# Altium PCB ECG_Ctrl_V1.0_ZM_20211208.PcbDoc (part 1 of 2)
Units mil, origin at the board's own origin, x right, y up, seen from the top; angles counter-clockwise.
Board outline 3748.77 x 3514.71 mil, 2 copper layers (Top Layer, Bottom Layer); 220 components, 162 nets, 692 pads, 666 vias.
Unrouted connection lines stored in the file: 1.
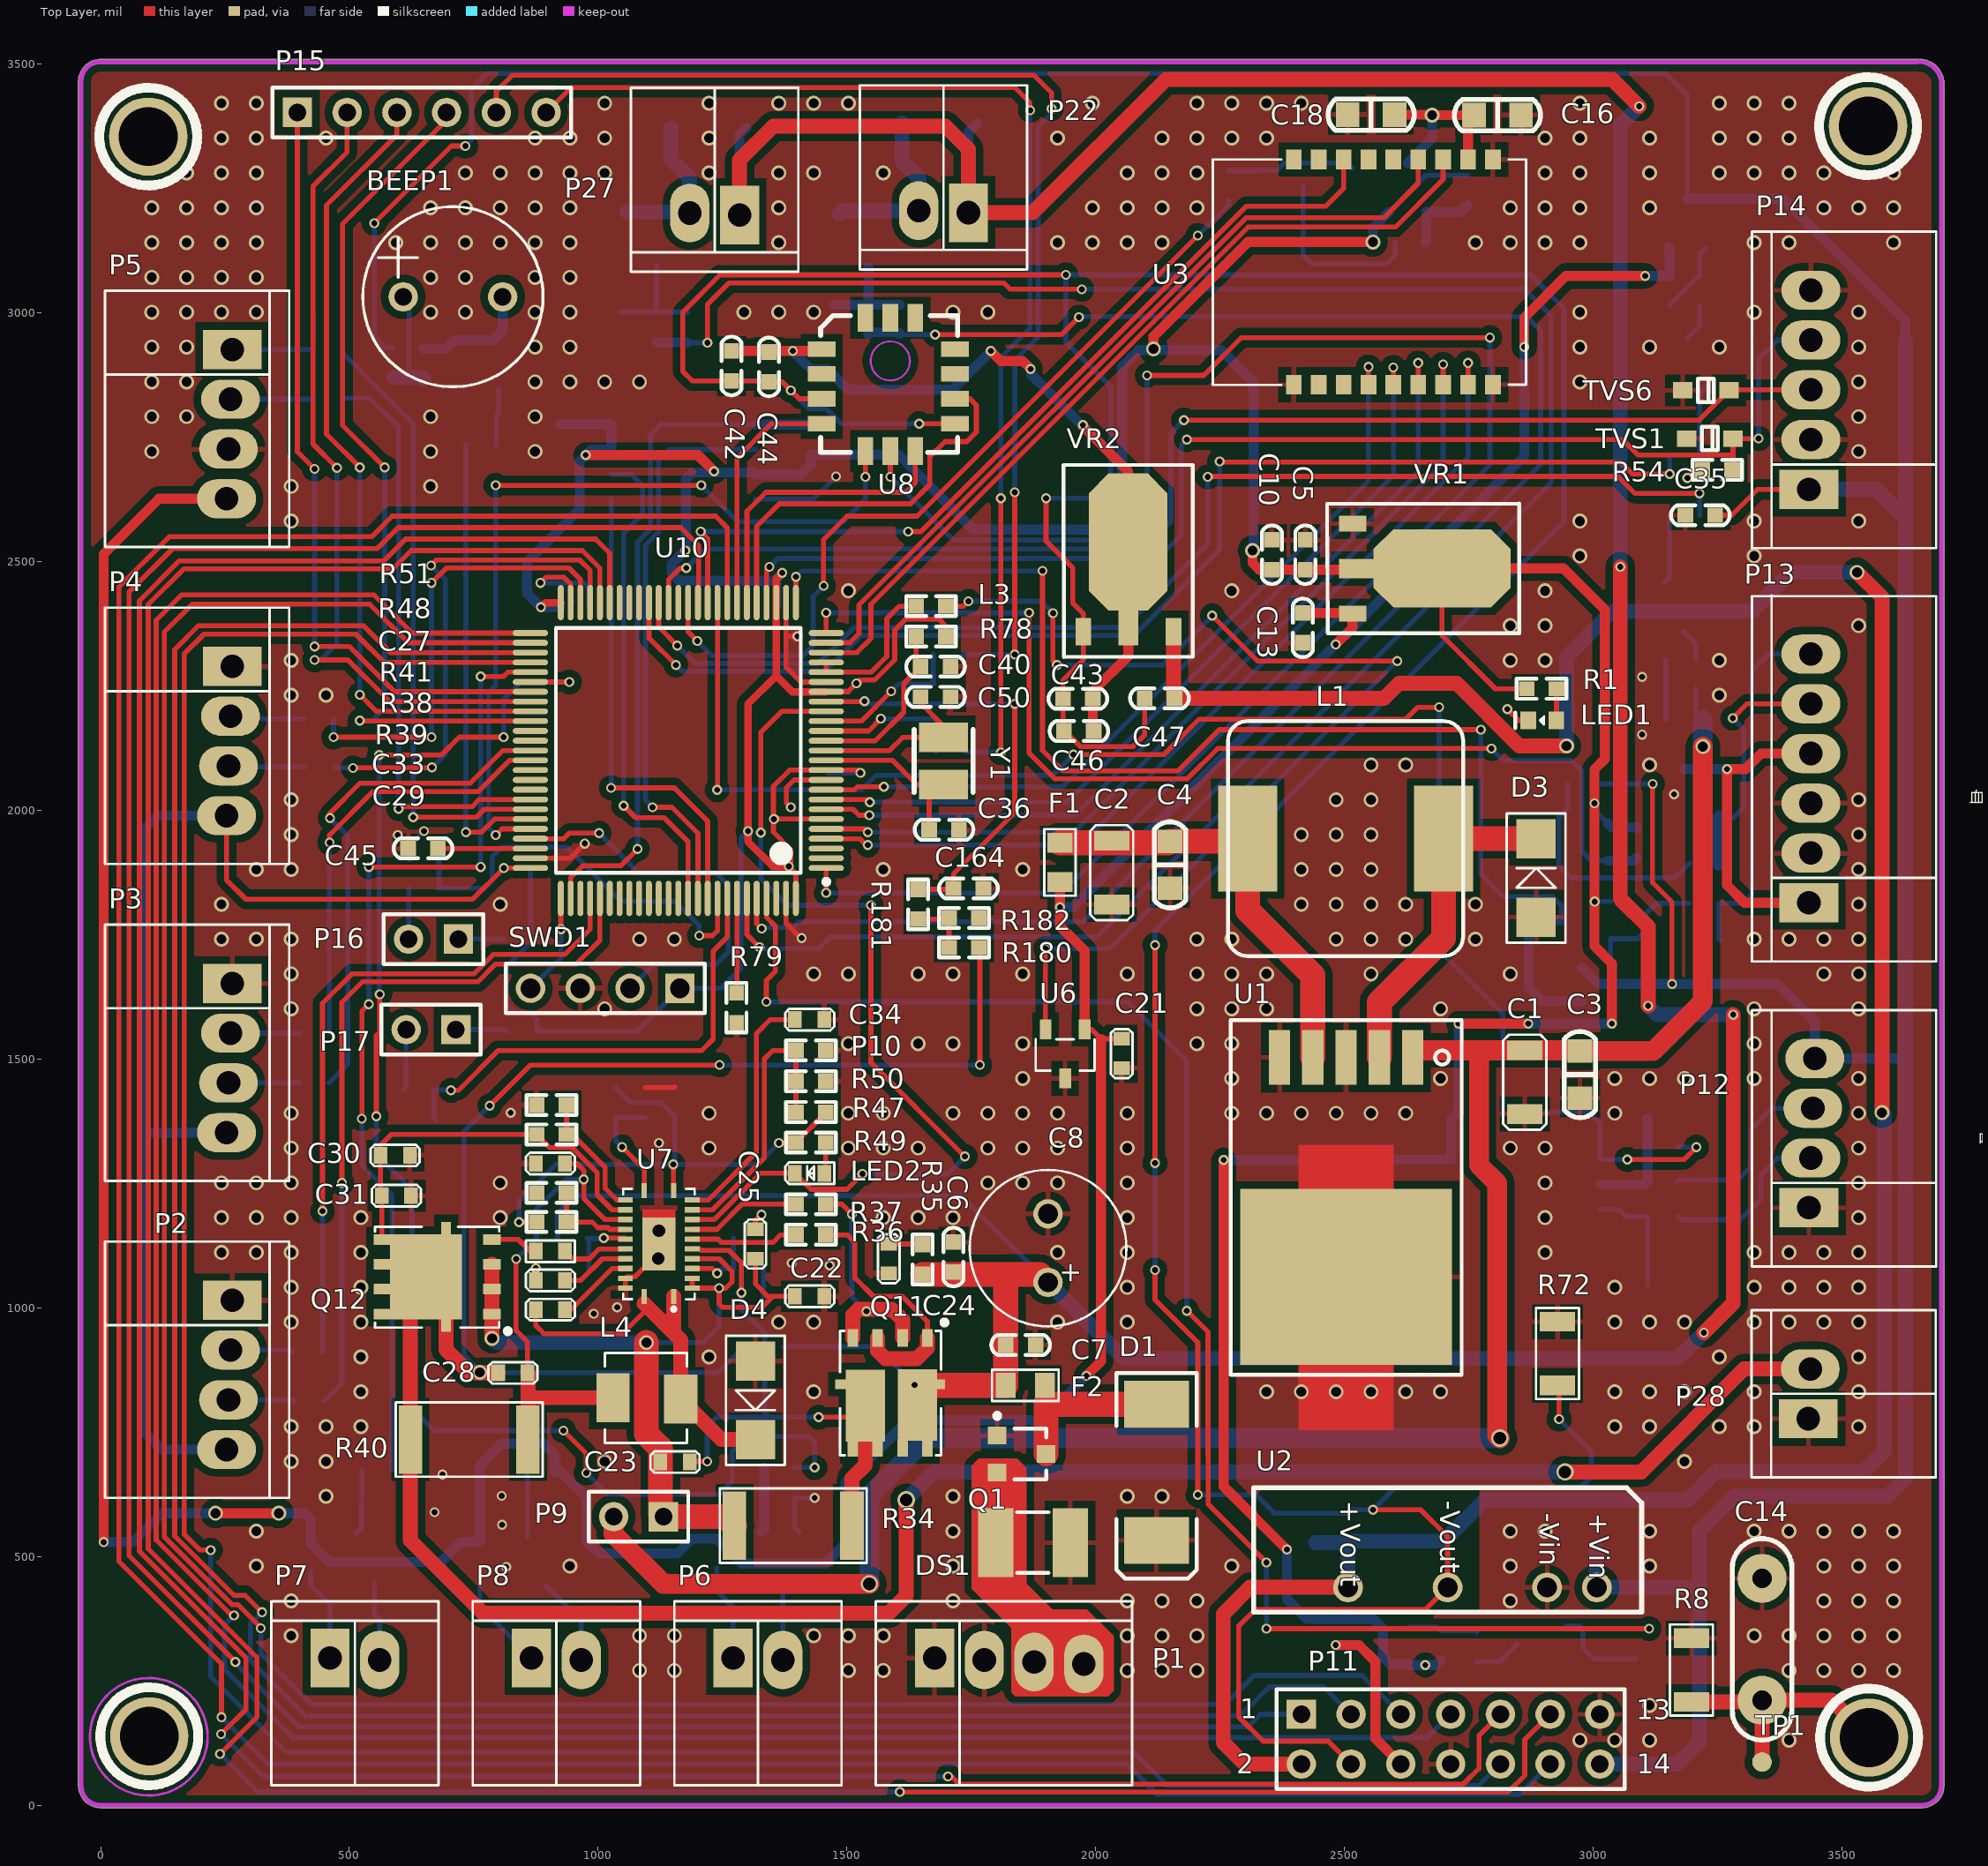
[diagram p0: Top Layer view]
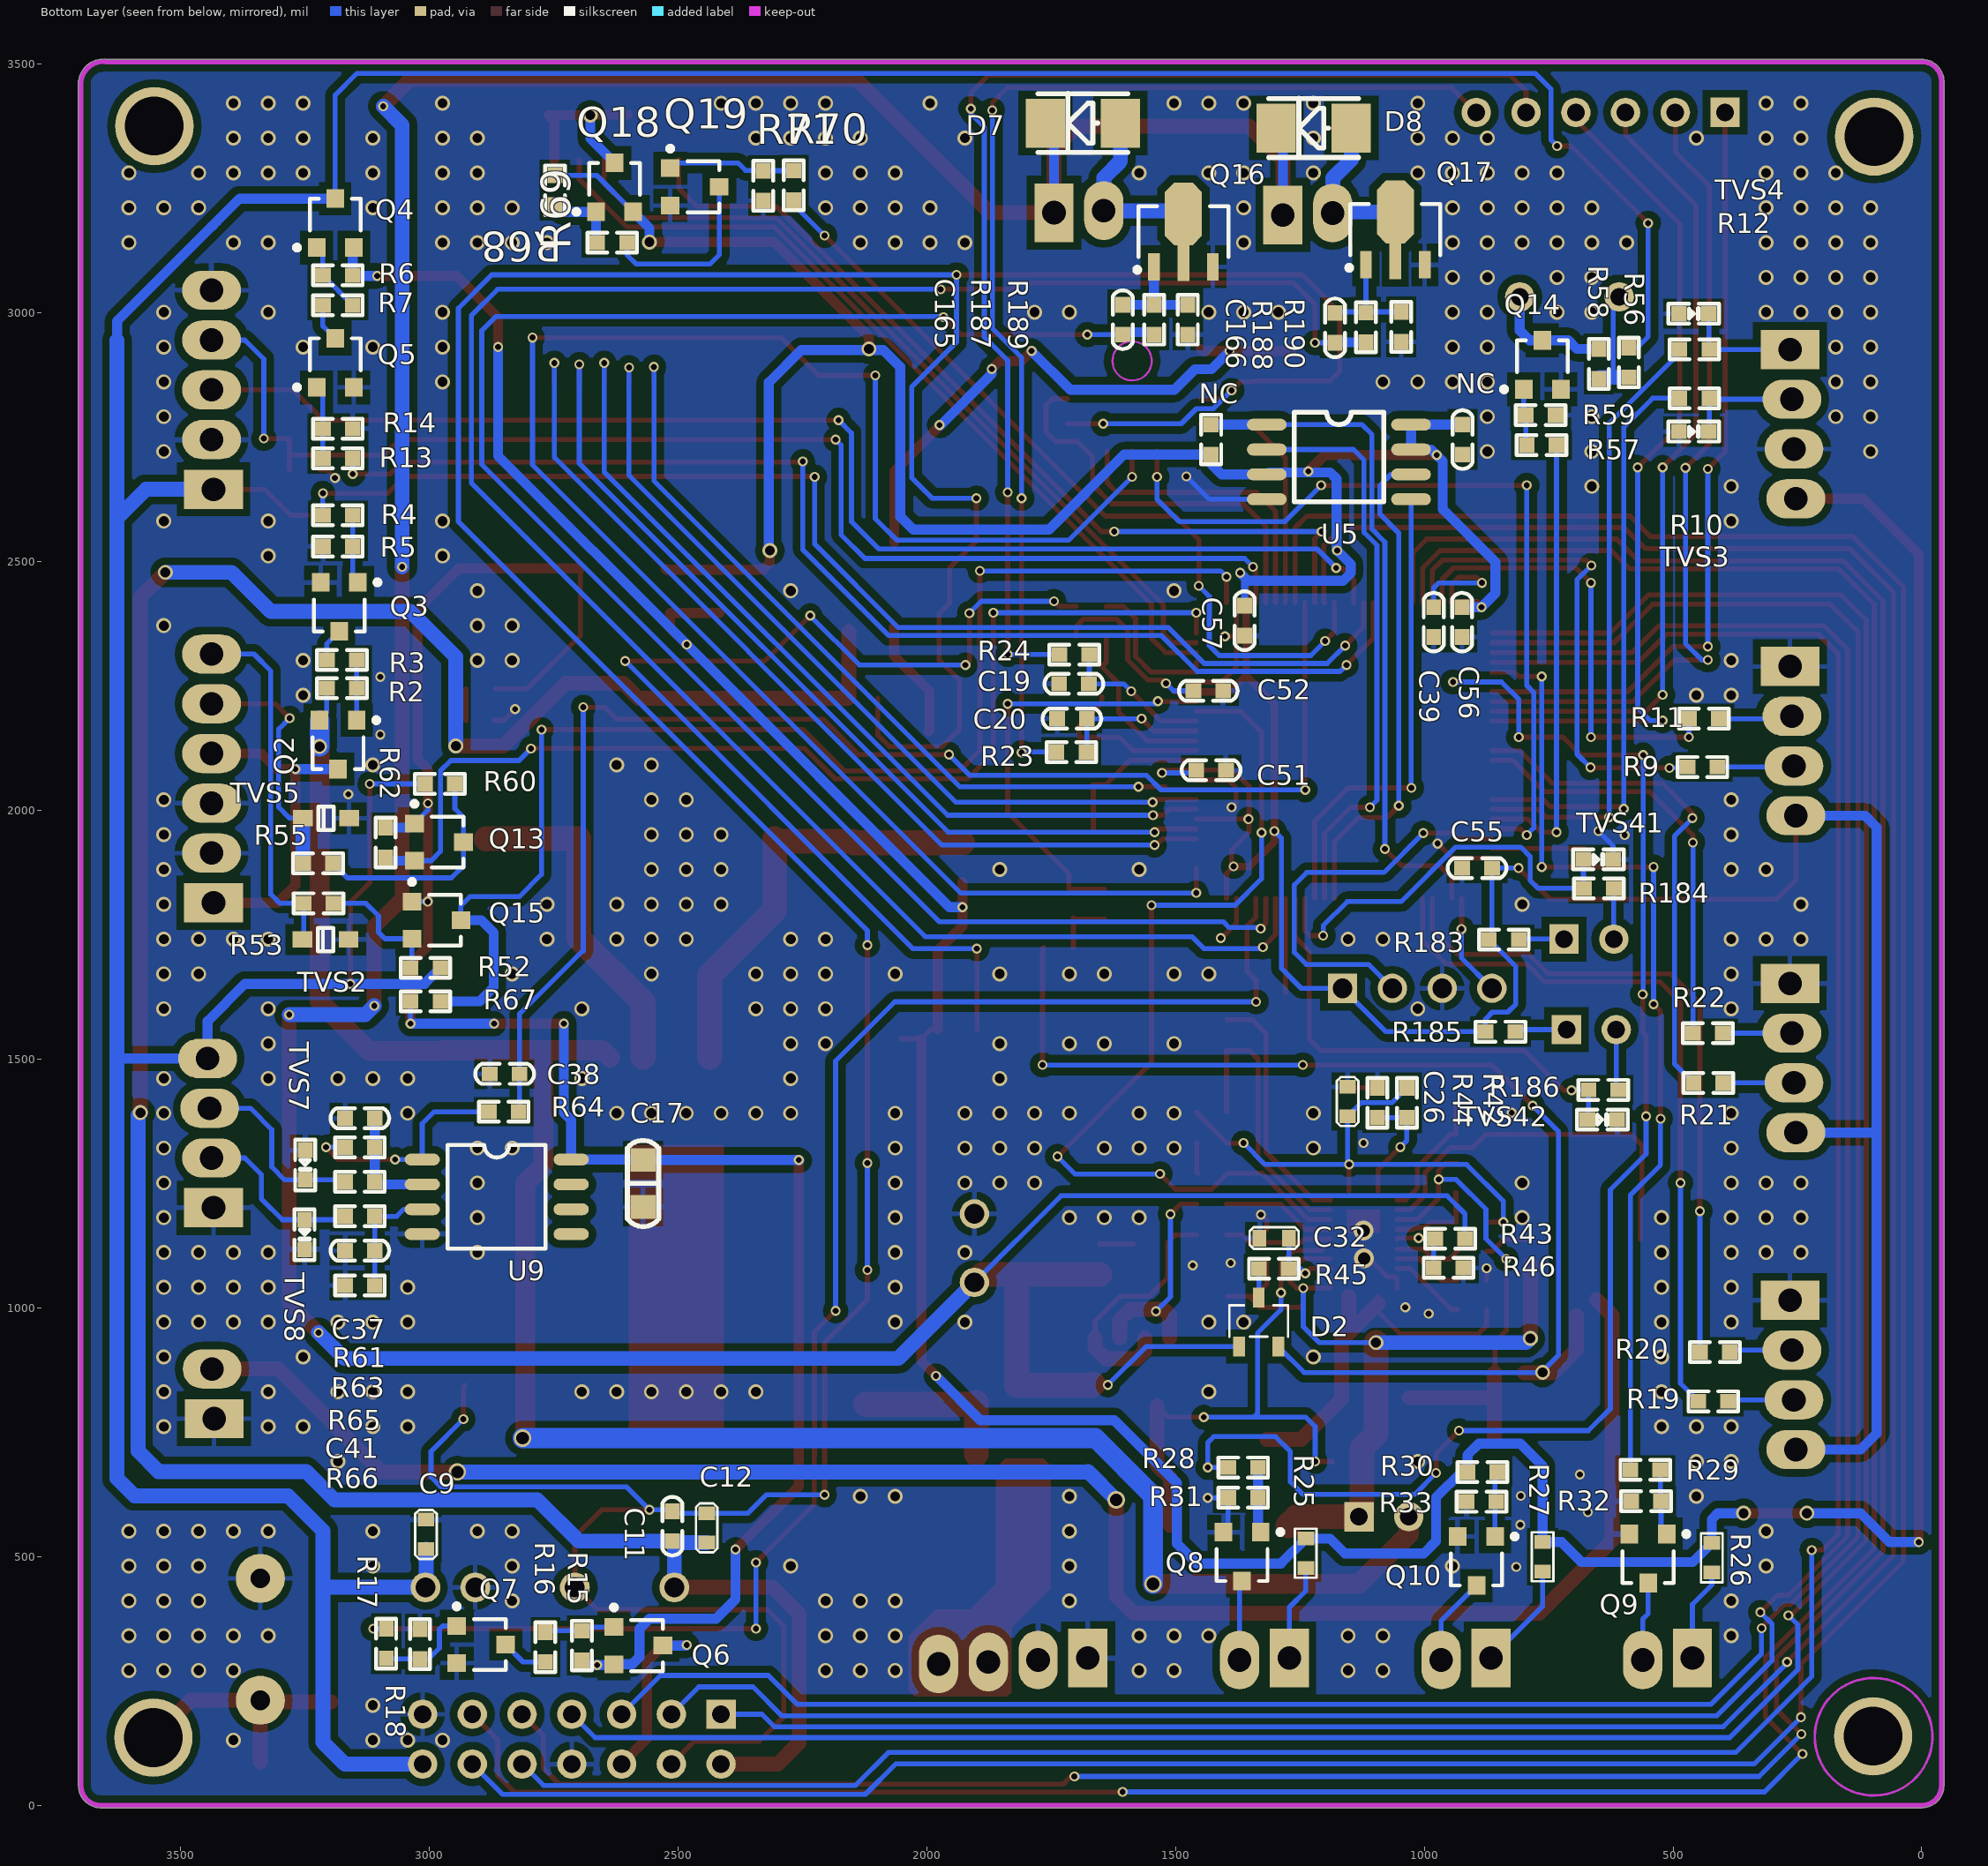
[diagram p1: Bottom Layer view, seen from below]
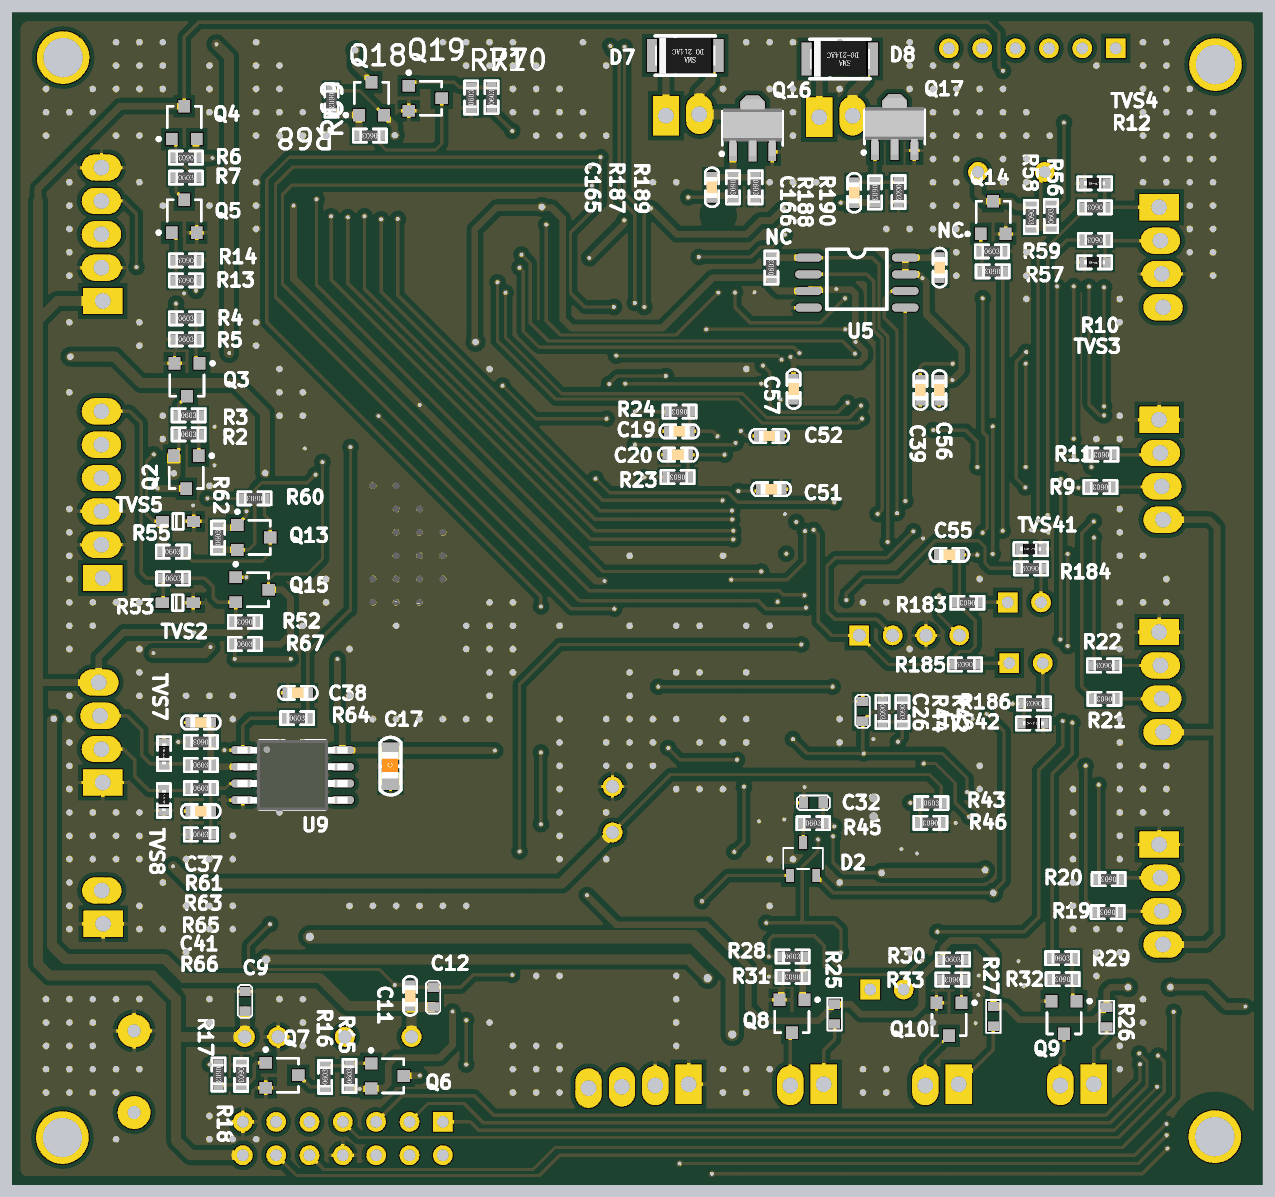
[diagram p3: 3D render of the assembled board from below, using the file's embedded part models]

## Layer stack, top to bottom
Top Layer: signal copper 1.4
Dielectric: dielectric 12.6, FR-4, Dk 4.8
Bottom Layer: signal copper 1.4

## Board outline
-44.39,39.37 cw(c-39.37,39.37) -44.36,39.87 cw(c-39.37,40.37) -44.39,40.37 -44.39,3465.57 cw(c-39.37,3465.57) -44.38,3465.85 cw(c0,3465) 0,3509.39 3648.56,3509.39 cw(c3654.43,3459.43) 3704.14,3467.12 cw(c3699.37,3465.57) 3704.39,3465.57 3704.39,40.37 cw(c3699.37,40.37) 3704.36,39.87 cw(c3699.37,39.37) 3704.39,39.37 cw(c3660,39.37) 3661.18,-5 cw(c3660.79,0) 3660.79,-5.01 0,-5.01 cw(c0,39.37)

## Design rules (kind name [scope] priority, off if disabled: settings)
Clearance Clearance_2 [InNet('NetC32_2')] p1: gap=20
Clearance Clearance_1 [InPolygon] p2: gap=15
Clearance [All] p3: gap=6
NetAntennae [All] p1: netantennaetolerance=200
PolygonConnect PolygonConnect_2 [InNet('NetC32_2')] p1: connectstyle=Direct reliefconductorwidth=10 reliefentries=4 polygonreliefangle="90 Angle"
PolygonConnect PolygonConnect_1 [isvia] p2: connectstyle=Direct reliefconductorwidth=10 reliefentries=4 polygonreliefangle="90 Angle"
PolygonConnect [All] p3: connectstyle=Relief reliefconductorwidth=10 reliefentries=4 polygonreliefangle="90 Angle"
RoutingVias [All] p1: holewidth=12 width=24 viastyle="Through Hole" minholewidth=8 minwidth=8 maxholewidth=200 maxwidth=200
SilkscreenOverComponentPads SilkToSolderMaskClearance [IsPad] p1: minsilkscreentomaskgap=2
SolderMaskExpansion [All] p1: expansion=4
Width [All] p1: maxlimit=360 minlimit=10 preferedwidth=10
26 further rules are at their usual default settings.

## Classes and differential pairs
component class 13_SPI_Flash: NC U5
component class 11_Speak: BEEP1 BP1 Q14 R56 R57 R58 R59
component class BlueToothi: C16 C17 C18 Q18 Q19 R68 R69 R70 R71 U3
component class Charger: C22 C23 C24 C25 C26 C27 C28 C29 C30 C31 C32 C33 C34 D2 D4 L4 LED2 P9 P10 P28 Q11 Q12 R34 R35 R36 R37 R38 R39 R40 R41 R42 R43 R44 R45 R46 R47 R48 R49 R50 R51 U7
component class cpu: C19 C20 C21 C36 C39 C40 C45 C50 C51 C52 C55 C56 C57 C164 C165 C166 D7 D8 L3 P6 P7 P8 P11 P15 P16 P17 P22 P27 Q8 Q9 Q10 Q16 Q17 R23 R24 R25 R26 R27 R28 R29 R30 R31 R32 R33 R78 R79 R180 R181 R182 R183 R184 R185 R186 R187 R188 R189 R190 SWD1 TVS41 TVS42 U6 U10 Y1
component class 05_USART: P2 P3 P4 P5 R9 R10 R11 R12 R19 R20 R21 R22 TVS3 TVS4
component class Sensor: C35 C37 C38 C41 C42 C43 C44 C46 C47 P12 P13 P14 Q13 Q15 R52 R53 R54 R55 R60 R61 R62 R63 R64 R65 R66 R67 TP4 TVS1 TVS2 TVS5 TVS6 TVS7 TVS8 U8 U9 VR2
component class 02_Power: C1 C2 C3 C4 C5 C6 C7 C8 C9 C10 C11 C12 C13 C14 D1 D3 DS1 F1 F2 L1 LED1 P1 Q1 Q2 Q3 Q4 Q5 Q6 Q7 R1 R2 R3 R4 R5 R6 R7 R8 R13 R14 R15 R16 R17 R18 R72 TP1 U1 U2 VR1

## Components (designator, comment, footprint, x,y, rotation, side; value= is the part's Value field where it differs from the comment)
BEEP1 "BEEP-9.5X5.5" BEEP-9.5X5.5 708,3032 r0 top
C1 "22uF/35V" 1206C 2862,1517.38 r270 top
C2 "22uF/35V" 1206C 2032,1938.42 r270 top
C3 "104 50V" SMD-0805C 2973,1468.67 r90 top
C4 "104 50V" SMD-0805C 2149,1890.18 r90 top
C5 "10uF 25V" SMD-0603C 2421,2513.54 r270 top
C6 "10uF25V" SMD-0603C 1714,1102 r270 top
C7 "104 50V" SMD-0603C 1849,925.37 r180 top
C8 "470uF/25V" 8*12 1904,1119.9 r270 top
C9 "0.1uF/ 25V" 0603C 3006.02,515 r90 bottom
C10 "104 50V" SMD-0603C 2354,2513.54 r270 top
C11 "10uF 25V" SMD-0603C 2511,561 r270 bottom
C12 "0.1uF/ 25V" 0603C 2442,528 r90 bottom
C13 "104 50V" SMD-0603C 2416,2366.54 r90 top
C14 "1nF/4kV" CY1 3339,211 r90 top
C16 "22uF 25V" SMD-0805C 2807.24,3397 r180 top
C17 "22uF 25V" SMD-0805C 2569.93,1249.76 r90 bottom
C18 "0.1uF 25V" SMD-0805C 2553.24,3398 r0 top
C19 "0.1uF/25V" SMD-0603C 1704,2254 r0 bottom
C20 "0.1uF/25V" SMD-0603C 1708,2184 r0 bottom
C21 "0.1uF" 0603C 2052,1540.48 r270 top
C22 "0.1uF/ 25V" 0603C 1395.46,1023.16 r0 top
C23 "0.1uF/ 25V" 0603C 1184.06,690 r180 top
C24 "2.2uF/ 25V" 0603C 1583.91,1128.21 r270 top
C25 "10uF/ 25V" 0603C 1315.91,1098.47 r90 top
C26 "1uF/ 25V" 0603C 1153.91,1384.85 r90 bottom
C27 "0.1uF/ 25V" 0603C 874.46,1289.88 r0 top
C28 "0.1uF/ 25V" 0603C 798.86,869.16 r0 top
C29 "0.047uF/ 25V" 0603C 874.46,996.16 r0 top
C30 "10uF/ 25V" 0603C 562.54,1306.16 r0 top
C31 "10uF/ 25V" 0603C 564.91,1225.16 r0 top
C32 "1uF/ 25V" 0603C 1271.94,1140 r0 bottom
C33 "1uF/ 25V" 0603C 874.46,1054.9 r0 top
C34 "0.1uF/ 25V" 0603C 1395.46,1579.16 r0 top
C35 "0.1uF/50V/X5R" SMD-0603C 3214.82,2593 r0 top
C36 "12P/50V" SMD-0603C 1695,1961 r0 top
C37 "47pF/50V/X5R" SMD-0603C 3139,1381 r0 bottom
C38 "47pF/50V/X5R" SMD-0603C 2848,1470 r180 bottom
C39 "4.7uF/10V/NC" SMD-0603C 981,2378 r90 bottom
C40 "1uF/50V" SMD-0603C 1678,2288.67 r180 top
C41 "47pF/50V/X5R" SMD-0603C 3139,1115 r180 bottom
C42 "104 50V" SMD-0603C 1268,2893 r90 top
C43 "10uF 25V" SMD-0603C 1964,2224 r0 top
C44 "10uF 10V" SMD-0603C 1343,2891 r90 top
C45 "4.7uF/10V/NC" SMD-0603C 648,1923.15 r0 top
C46 "0.1uF/50V/X5R" SMD-0603C 1966,2159 r0 top
C47 "104 50V" SMD-0603C 2128,2225 r0 top
C50 "12P/50V" SMD-0603C 1678,2228 r0 top
C51 "0.1uF/50V" SMD-0603C 1428.24,2080.63 r0 bottom
C52 "0.1uF/50V" SMD-0603C 1434,2240 r0 bottom
C55 "0.1uF/50V" SMD-0603C 893.76,1883.78 r180 bottom
C56 "0.1uF/50V" SMD-0603C 924,2378 r90 bottom
C57 "0.1uF/50V" SMD-0603C 1361,2381 r90 bottom
C164 "0.1uF/25V" SMD-0603C 1744,1843 r0 top
C165 "1uF/50V/X5R" SMD-0603C 1606,2986 r270 bottom
C166 "1uF/50V/X5R" SMD-0603C 1179.26,2969.51 r270 bottom
D1 "SMCJ12CA" SMC 2122,669.19 r270 top
D2 "BAT54C" SOT23-3 1372,922 r270 bottom
D3 "SS34" SMA 2885,1785 r90 top
D4 "SS34" SMA 1315.91,892.64 r270 top
D7 "1N4007" DO-214-AC 1686,3381 r0 bottom
D8 "1N4007" DO-214-AC 1222,3371 r0 bottom
DS1 "UN1812-90CSMD" SMD-1812 1873.8,528 r0 top
F1 "SMD0805P200" 0805r 1928,1934.42 r270 top
F2 "SMD0805P200" 0805R 1897.74,844 r180 top
L1 "CDRH127-33uH" CDRH-127 2502,1943 r180 top
L3 "MPZ1608D101BTA00" SMD-0603 1669,2410 r180 top
L4 "3.3uH/4A/4*4" INDUCTOR_4X4X2 1165.74,816.85 r180 top
LED1 "蓝光 3528" SMD-0603D 2898,2180 r180 top
LED2 "24V" 0603LED 1454.52,1270.27 r180 top
NC "104 50V" SMD-0603C 923,2745 r270 bottom
NC "4.7K" SMD-0603 1428,2745 r90 bottom
P1 "XH2.54-4P直插" 4X2.54MMW 1676,296 r0 top
P2 "1*4P" 4X2.54MMW 264.87,1015 r270 top
P3 "1*4P" 4X2.54MMW 264.87,1652 r270 top
P4 "1*4P" 4X2.54MMW 264.87,2289 r270 top
P5 "1*4P" 4X2.54MMW 264.87,2926 r270 top
P6 "Header 2" 2X2.54MMw 1271,296 r0 top
P7 "Header 2" 2X2.54MMw 461,296 r0 top
P8 "Header 2" 2X2.54MMw 866,296 r0 top
P9 "Header 2" HDR1X2 1131,580 r180 top
P10 "NTC-MF52AT 10K" SMD-0603 1427.21,1517.16 r0 top
P11 "Header 7X2" HDR2X7 2413.02,183 r0 top locked
P12 "XH2.54-4P直插" 4X2.54MMw 3433.06,1201 r90 top
P13 "XH2.54 6P 立贴" 6X2.54MMW 3433.06,1814 r90 top
P14 "XH2.54 5P 立贴" 5X2.54MMW 3433.06,2645 r90 top
P15 "Header 6" HDR1X6 395.37,3402.63 r0 top locked
P16 "Header 2" HDR1X2 719,1741 r180 top
P17 "Header 2" HDR1X2 714,1559 r180 top
P22 "VH2.54-2P" 2X2.54MMw 1744,3201 r180 top
P27 "VH2.54-2P" 2X2.54MMw 1284,3196.37 r180 top
P28 "Header 2" 2X2.54MMW 3432,777 r90 top
Q1 "AO3401" SOT-23 1851,706 r270 top
Q2 "AO3401" SOT-23 3182.72,2131.79 r0 bottom
Q3 "S8050" SOT-23 3180.4,2408.79 r0 bottom
Q4 "AO3401" SOT-23 3188.5,3180 r180 bottom
Q5 "S8050" SOT-23 3188.5,2899.21 r180 bottom
Q6 "AO3401" SOT-23 2579.21,321 r270 bottom
Q7 "S8050" SOT-23 2895.21,323 r270 bottom
Q8 "S8050" SOT-23 1366,500 r0 bottom
Q9 "S8050" SOT-23 550,496 r0 bottom
Q10 "S8050" SOT-23 895,491.06 r0 bottom
Q11 "Si7998DP" Si7998DP 1687.94,976.44 r270 top
Q12 "Si7135DP" "PowerPAK SO-8" 824.19,960.99 r180 top
Q13 "AO3400" SOT-23 2980,1936 r270 bottom
Q14 "LH8050QLT1G" SOT-23 762.6,2895.21 r180 bottom
Q15 "AO3400" SOT-23 2985,1779 r270 bottom
Q16 "D882M" SOT-89-3 1484,3163 r180 bottom
Q17 "D882M" SOT-89-3 1058,3167 r180 bottom
Q18 "AO3401" SOT-23 2627,3251.79 r180 bottom
Q19 "S8050" SOT-23 2466,3253 r270 bottom
R1 "1K" SMD-0603 2896,2244 r0 top
R2 "47K" SMD-0603 3175.32,2245 r180 bottom
R3 "1K" SMD-0603 3175.32,2302 r180 bottom
R4 "1K" SMD-0603 3183.32,2593 r180 bottom
R5 "10K" SMD-0603 3183.32,2530 r180 bottom
R6 "47K" SMD-0603 3183.32,3075 r0 bottom
R7 "1K" SMD-0603 3183.32,3015 r180 bottom
R8 "10M 5%" 1206r 3197,335.95 r270 top
R9 "10R" SMD-0603 441,2087 r0 bottom
R10 "100R" SMD-0603 457,2828 r0 bottom
R11 "10R" SMD-0603 438,2184 r0 bottom
R12 "100R" SMD-0603 457,2926 r0 bottom
R13 "1K" SMD-0603 3183.32,2707 r0 bottom
R14 "10K" SMD-0603 3183.32,2767 r0 bottom
R15 "47K" SMD-0603 2693,321 r90 bottom
R16 "1K" SMD-0603 2766,318 r90 bottom
R17 "1K" SMD-0603 3086,325 r270 bottom
R18 "10K" SMD-0603 3018,324 r270 bottom
R19 "10R" SMD-0603 419,812 r0 bottom
R20 "10R" SMD-0603 416,911 r0 bottom
R21 "10R" SMD-0603 429,1452 r0 bottom
R22 "10R" SMD-0603 430,1552 r0 bottom
R23 "1K/0.1%" SMD-0603 1709,2117 r0 bottom
R24 "1K/0.1%" SMD-0603 1703,2313 r0 bottom
R25 "100R" 0603r 1238,477 r90 bottom
R26 "100R" 0603r 422,468 r90 bottom
R27 "100R" 0603r 762,469.94 r90 bottom
R28 "1K" SMD-0603 1364,679 r180 bottom
R29 "1K" SMD-0603 555.54,674 r180 bottom
R30 "1K" SMD-0603 883,670 r180 bottom
R31 "47K" SMD-0603 1364,618 r0 bottom
R32 "47K" SMD-0603 554,611 r0 bottom
R33 "47K" SMD-0603 885,610 r0 bottom
R34 "10mR" 2512R 1510,562 r180 top
R35 "2" SMD-0603 1651.91,1097.16 r270 top
R36 "4.02K" SMD-0603 1427.21,1146.5 r180 top
R37 "4.02K" SMD-0603 1427.21,1208.28 r0 top
R38 "100K" SMD-0603 906.21,1172.18 r180 top
R39 "1K" 0603R 933.52,1113.65 r180 top
R40 "10mR" 2512R 858.91,735.16 r180 top
R41 "22.1K" SMD-0603 906.21,1230.92 r0 top
R42 "232K" SMD-0603 1034.91,1412.16 r270 bottom
R43 "1M" SMD-0603 948,1138.79 r180 bottom
R44 "32.4K" SMD-0603 1094.3,1412.16 r270 bottom
R45 "10" SMD-0603 1302.13,1078.79 r180 bottom
R46 "100K" SMD-0603 951,1080 r0 bottom
R47 "2.2K" SMD-0603 1427.21,1393.61 r0 top
R48 "299K/1%" SMD-0603 906.21,1348.41 r0 top
R49 "1.5K" SMD-0603 1427.21,1331.83 r0 top
R50 "6.8K" SMD-0603 1427.21,1455.39 r180 top
R51 "60K/1%" SMD-0603 906.21,1407.16 r180 top
R52 "10K" SMD-0603 3007,1683 r0 bottom
R53 "20R" SMD-0603 3222,1813 r180 bottom
R54 "10K" SMD-0603 3249,2684 r0 top
R55 "20R" SMD-0603 3223,1893 r180 bottom
R56 "51R" SMD-0603 589,2900 r90 bottom
R57 "4.7K" SMD-0603 764,2734 r0 bottom
R58 "1K" SMD-0603 649,2897 r270 bottom
R59 "47K" SMD-0603 766,2794 r180 bottom
R60 "10K" SMD-0603 2978,2053 r0 bottom
R61 "399K" SMD-0603 3139,1322.6 r0 bottom
R62 "10K" SMD-0603 3087,1935 r90 bottom
R63 "100K" SMD-0603 3139,1253.2 r180 bottom
R64 "100K" SMD-0603 2850,1394 r180 bottom
R65 "100K" SMD-0603 3139,1183.8 r180 bottom
R66 "399K" SMD-0603 3139,1045 r180 bottom
R67 "10K" SMD-0603 3007,1616 r180 bottom
R68 "47K" SMD-0603 2747,3246 r270 bottom
R69 "1K" SMD-0603 2632,3141 r0 bottom
R70 "1K" SMD-0603 2267,3256 r90 bottom
R71 "10K" SMD-0603 2328,3255 r90 bottom
R72 "0" 1206r 2928,844 r90 top
R78 "10K" SMD-0603 1669,2349.33 r0 top
R79 "100K" SMD-0603 1278,1603 r90 top
R180 "100K/1%" SMD-0603 1735,1724 r180 top
R181 "60K/1%" SMD-0603 1643,1811 r90 top
R182 "30K/1%" SMD-0603 1735,1783.5 r0 top
R183 "1K" SMD-0603 840,1740 r0 bottom
R184 "1K" SMD-0603 649,1843 r0 bottom
R185 "1K" SMD-0603 847,1555 r0 bottom
R186 "1K" SMD-0603 640,1438 r0 bottom
R187 "100R" SMD-0603 1543,2986 r270 bottom
R188 "100R" SMD-0603 1117.26,2970.51 r270 bottom
R189 "10K" SMD-0603 1475,2986 r270 bottom
R190 "10K" SMD-0603 1046.26,2971.51 r270 bottom
SWD1 "SIP-4 (NC)" SIP-4 1014,1642 r180 top
TP1 "TPS" tpd 3339,87 r90 top
TVS1 "PSD03C-LF-T7" SOD-323 3234,2747 r0 top
TVS2 "PSD03C-LF-T7" SOD-323 3208,1740 r0 bottom
TVS3 "ESD5Z5.0CT1G" SOD-523 458,2761 r180 bottom
TVS4 "ESD5Z5.0CT1G" SOD-523 458,2998 r180 bottom
TVS5 "PSD03C-LF-T7" SOD-323 3207,1984 r0 bottom
TVS6 "PSD03C-LF-T7" SOD-323 3226,2844 r0 top
TVS7 "ESD5Z5.0CT1G" SOD-523 3249,1287 r270 bottom
TVS8 "ESD5Z5.0CT1G" SOD-523 3250,1147 r270 bottom
TVS41 "ESD5Z5.0CT1G" SOD-523 650,1901 r180 bottom
TVS42 "ESD5Z5.0CT1G" SOD-523 642,1378 r180 bottom
U1 "LM2596S 5.0V" TO-263-5 2503,1502.94 r180 top
U2 "B0505LS-1W" HKSXXXXB-1W 3007,438 r180 top
U3 "E104-BT5010A" E104-BT503 2235.01,2855.24 r270 top
U5 "W25Q128FVSIG" SO-8W 1316.37,2775 r180 bottom
U6 "REF3033AIDBZR" SOT23-3 1977.74,1559.42 r90 top
U7 "BQ24171RGYR" bq24171 1122,1128 r180 top
U8 "MMR901XA" MMR901XA 1587,2844 r270 top
U9 "OPA2376AID" SOIC-8 2864,1223 r180 bottom
U10 "GD32F405VGTx" STM-LQFP100_N 1161,2120 r180 top
VR1 "LM1117 3.3V" SOT223 2516.06,2576.09 r270 top
VR2 "LM1117 3.3V" SOT223 1975,2359 r0 top
Y1 "8MHz" XTAL-3225-2 1694,2099 r270 top

## Footprints (in the part's own frame and the unit in brackets; to place one, negate y for a bottom-side part, rotate by r counter-clockwise, add the part's x,y. Pads: shape width x height; smd on the part's side, far side on the other; paste and mask are expansions set on the pad)
2X2.54MMw [mm]
  rect 2x3 hole 1.2: 1(0,0)
  oval 2x3 hole 1.2: 2(2.54,-0.1)
  silkscreen extent -3,-6.5 5.54,2.9
2X2.54MMW [mm]
  rect 2x3 hole 1.2: 1(0,0)
  oval 2x3 hole 1.2: 2(2.54,-0.1)
  silkscreen extent -3,-6.5 5.54,2.9
4X2.54MMW [mm]
  rect 2x3 hole 1.2: 1(0,0)
  oval 2x3 hole 1.2: 2(2.54,-0.1) 3(5.08,-0.2) 4(7.62,-0.3)
  silkscreen extent -3,-6.5 10.08,2.9
4X2.54MMw [mm]
  rect 2x3 hole 1.2: 1(0,0)
  oval 2x3 hole 1.2: 2(2.54,-0.1) 3(5.08,-0.2) 4(7.62,-0.3)
  silkscreen extent -3,-6.5 10.08,2.9
5X2.54MMW [mm]
  rect 2x3 hole 1.2: 1(0,0)
  oval 2x3 hole 1.2: 2(2.54,-0.1) 3(5.08,-0.1) 4(7.62,-0.1) 5(10.16,-0.1)
  silkscreen extent -3,-6.5 13.16,2.9
6X2.54MMW [mm]
  rect 2x3 hole 1.2: 1(0,0)
  oval 2x3 hole 1.2: 2(2.54,-0.1) 3(5.08,-0.1) 4(7.62,-0.1) 5(10.16,-0.1) 6(12.7,-0.1)
  silkscreen extent -3,-6.5 15.68,2.9
8*12 [mm]
  round 1.5 hole 1: 1(1.75,0) 2(-1.75,0)
  silkscreen extent -4,-4 4,4
0603C [mm]
  rect 0.7x0.85 smd: 1(0,0) 2(1.5,0)
  silkscreen extent -0.5,-0.55 2,0.55
0603LED [mm]
  rect 0.7x0.85 smd: 1(0,0) 2(1.5,0)
  silkscreen extent -0.5,-0.55 2,0.55
0603r [mm]
  rect 0.7x0.85 smd: 1(0,0) 2(1.5,0)
  silkscreen extent -0.5,-0.55 2,0.55
0603R [mm]
  rect 0.7x0.85 smd: 1(0,0) 2(1.5,0)
  silkscreen extent -0.5,-0.55 2,0.55
0805r [mm]
  rect 1x1.3 smd: 1(0,0) 2(2,0)
  silkscreen extent -0.7,-0.8 2.7,0.8
0805R [mm]
  rect 1x1.3 smd: 1(0,0) 2(2,0)
  silkscreen extent -0.7,-0.8 2.7,0.8
1206C [mm]
  rect 1x1.8 smd: 1(0,0) 2(3.25,0)
  silkscreen extent -0.8,-1.1 4.05,1.1
1206r [mm]
  rect 1x1.8 smd: 1(0,0) 2(3.25,0)
  silkscreen extent -0.7,-1.1 3.95,1.1
2512R [mm]
  rect 1.2x3.5 smd: 1(0,0) 2(6,0)
  silkscreen extent -0.75,-1.9 6.75,1.9
BEEP-9.5X5.5 [mm]
  round 1.5 hole 0.9: 1(-2.54,0) 2(2.54,0)
  silkscreen extent -4.6,-4.6 4.6,4.6
bq24171 [mm]
  rect 0.28x0.75 smd: 1(-0.75,2.678) 12(-0.75,-2.729) 13(0.75,-2.729) 24(0.75,2.678)
  rect 0.75x0.28 smd: 2(-1.702,2.25) 3(-1.704,1.75) 4(-1.704,1.25) 5(-1.704,0.75) 6(-1.704,0.25) 7(-1.704,-0.25) 8(-1.704,-0.75) 9(-1.704,-1.25) 10(-1.704,-1.75) 11(-1.704,-2.25) 14(1.704,-2.25) 15(1.704,-1.75) 16(1.704,-1.25) 17(1.704,-0.75) 18(1.704,-0.25) 19(1.704,0.25) 20(1.704,0.75) 21(1.704,1.25) 22(1.704,1.75) 23(1.704,2.25)
  rect 1.7x2.7 smd: 25(0,0)
  silkscreen extent -1.83,-2.82 1.83,3.38
CDRH-127 [mm]
  rect 3x5.4 smd: 1(-5,0) 2(5,0)
  silkscreen extent -6,-6 6,6, body extent -6,-6 6,6, height 8.2
CY1 [mm]
  round 2.5 hole 1: 1(0,0) 2(6.223,0)
  silkscreen extent -2.03,-1.52 8.25,1.52
DO-214-AC [mm]
  rect 2x2.5 smd: 1(-1.915,0) 2(1.915,0)
  silkscreen extent -2.3,-1.52 2.3,1.5, body extent -2.3,-1.35 2.3,1.35, height 2.4
E104-BT503 [mm]
  rect 1x0.8 smd: 1(0,4.14) 2(0,5.41) 3(0,6.68) 4(0,7.95) 5(0,9.22) 6(0,10.49) 7(0,11.76) 8(0,13.03) 9(0,14.3) 16(-11.5,14.3) 17(-11.5,13.03) 18(-11.5,11.76) 19(-11.5,10.49) 20(-11.5,9.22) 21(-11.5,7.95) 22(-11.5,6.68) 23(-11.5,5.41) 24(-11.5,4.14)
  silkscreen extent -11.5,0 0.01,16
HDR1X2 [mm] "Connector; Header; 2 Position"
  rect 1.5x1.5 hole 0.9: 1(0,0)
  round 1.5 hole 0.9: 2(2.54,0)
  silkscreen extent -1.27,-1.27 3.81,1.27
HDR1X6 [mm] "Connector; Header; 6 Position"
  rect 1.5x1.5 hole 0.9: 1(0,0)
  round 1.5 hole 0.9: 2(2.54,0) 3(5.08,0) 4(7.62,0) 5(10.16,0) 6(12.7,0)
  silkscreen extent -1.27,-1.27 13.97,1.27
HDR2X7 [mm] "Connector; Header; 7x2 Position"
  rect 1.5x1.5 hole 0.9: 1(0,0)
  round 1.5 hole 0.9: 2(0,-2.54) 3(2.54,0) 4(2.54,-2.54) 5(5.08,0) 6(5.08,-2.54) 7(7.62,0) 8(7.62,-2.54) 9(10.16,0) 10(10.16,-2.54) 11(12.7,0) 12(12.7,-2.54) 13(15.24,0) 14(15.24,-2.54)
  silkscreen extent -1.27,-3.81 16.51,1.27
HKSXXXXB-1W [mil]
  round 60 hole 40: 1(0,0) 2(100,0) 4(300,0) 6(500,0)
  silkscreen extent -90,-200 690,50
INDUCTOR_4X4X2 [mm]
  rect 1.7x2.5 smd: 1(0,0) 2(3.45,-0.059)
  silkscreen extent -0.32,-2.35 3.88,2.25
MMR901XA [mm]
  rect 0.8x1.4 smd: 1(-2.105,-3.5) 2(-0.835,-3.5) 3(0.435,-3.5) 4(1.705,-3.5) 8(1.705,3.3) 9(0.435,3.3) 10(-0.835,3.3) 11(-2.105,3.3)
  rect 1.4x0.8 smd: 5(3.1,-1.27) 6(3.1,0) 7(3.1,1.27) 12(-3.7,1.27) 13(-3.7,0) 14(-3.7,-1.27)
  Keep-Out Layer circle w0.1: c-1.5,0 r1
  silkscreen extent -3.81,-3.56 3.18,3.43
"PowerPAK SO-8" [mm]
  rect 0.9x0.54 smd: 1(0.95,-0.67) 2(0.95,-1.94) 3(0.95,-3.21) 4(0.95,-4.48) 5(6.548,-4.48) 6(6.548,-3.21) 7(6.548,-1.94) 8(6.548,-0.67)
  rect 0.5x1.6 smd: 5(3.3,-4.575) 8(3.3,-0.575)
  rect 3.66x2.5 smd: 5(4.325,-3.495)
  rect 3.66x2 smd: 8(4.325,-1.401)
  silkscreen extent 0.03,-5.12 6.93,0.33
Si7998DP [mm]
  rect 0.9x0.54 smd: 1(0.95,-0.67) 2(0.95,-1.94) 3(0.95,-3.21) 4(0.95,-4.48) 5(6.548,-4.48) 6(6.548,-3.21) 7(6.548,-1.94) 8(6.548,-0.67)
  rect 0.5x1.6 smd: 5(3.3,-4.575) 8(3.3,-0.575)
  rect 3.66x2 smd: 5(4.401,-3.836) 8(4.369,-1.168)
  silkscreen extent 0.03,-5.12 6.93,0.33
SIP-4 [mm]
  rect 1.5x1.5 hole 1: 1(-3.81,0)
  round 1.5 hole 1: 2(-1.27,0) 3(1.27,0) 4(3.81,0)
  silkscreen extent -5.08,-1.27 5.08,1.27
SMA [mm]
  rect 2x2 smd: 1(0,0) 2(4,0)
  silkscreen extent -1.3,-1.5 5.3,1.5
SMC [mm] "DO-214-AB/SMC; 2 C-Bend Leads; Body 7.9 x 5.9 mm, inc. leads (LxW)"
  rect 2.4x3.3 smd: 1(-3.475,0) 2(3.475,0)
  silkscreen extent -5.07,-2.05 5.43,2.05
SMD-0603 [mil]
  rect 31.5x30 smd: 1(-30,0) 2(30,0)
  silkscreen extent -50,-20 50,20, body extent -31,-16 31,16, height 18
SMD-0603C [mil]
  rect 31.5x30 smd: 1(-30,0) 2(30,0)
  silkscreen extent -59,-20 59,20, body extent -32,-16 32,16, height 31
SMD-0603D [mm]
  rect 0.8x0.9 smd: 1(-0.7,-0.012) 2(0.73,-0.012)
  silkscreen extent -0.08,-0.41 1.4,0.39, body extent -0.8,-0.39 0.8,0.41, height 0.6
SMD-0805C [mm]
  rect 1.2x1.27 smd: 1(-1.2,0) 2(1.2,0)
  silkscreen extent -2.2,-0.8 2.2,0.8, body extent -1.42,-0.67 1.58,0.73, height 0.93
SMD-1812 [mm]
  rect 1.8x3.5 smd: 1(-1.9,0) 2(1.9,0)
  silkscreen extent -0.8,-1.55 0.8,1.55, body extent -2.4,-1.7 2.4,1.7, height 1.4
SO-8W [mil]
  oval 80x24 smd: 1(0,0) 2(0,-50) 3(0,-100) 4(0,-150) 5(290,-150) 6(290,-100) 7(290,-50) 8(290,0)
  silkscreen extent 55,-155 235,25
SOD-323 [mm]
  rect 1x0.83 smd: 1(-1.18,0) 2(1.18,0)
  silkscreen extent -0.4,-0.6 0.4,0.6, body extent -1.4,-0.68 1.4,0.67, height 0.75
SOD-523 [mil]
  rect 31.5x30 smd: 1(-30,0) 2(30,0)
  silkscreen extent -51,-20 51,20, body extent -31,-16 31,16, height 26
SOIC-8 [mm]
  oval 1.8x0.6 smd: 1(-3.8,1.905) 2(-3.8,0.635) 3(-3.8,-0.635) 4(-3.8,-1.905) 5(3.8,-1.905) 6(3.8,-0.635) 7(3.8,0.635) 8(3.8,1.905)
  silkscreen extent -2.5,-2.64 2.5,2.64, body extent -4.2,-2.69 4.2,2.69, height 2.3
SOT23-3 [mm]
  rect 1x0.6 smd: 1(0,0) 2(0,2) 3(-2.5,1)
  silkscreen extent -2.1,-0.5 -0.5,2.5
SOT223 [mm]
  rect 0.8x1.4 smd: 1(0,0) 3(4.6,0)
  rect 1x1.854 smd: 2(2.3,0.227)
  oct 4x7 smd: 4(2.286,4.572)
  silkscreen extent -1.02,-1.3 5.59,8.51
SOT-23 [mm] "SOT-23; 3 Leads; Body 3.0 x 2.6 mm, inc. leads (LxW max)"
  rect 0.9x0.95 smd: 1(-0.95,-1.25) 2(0.95,-1.25) 3(0,1.25)
  silkscreen extent -2.07,-1.37 1.3,1.25
SOT-89-3 [mm]
  rect 0.6x1.4 smd: 1(-1.5,-1.8) 3(1.5,-1.8)
  rect 0.6x2 smd: 2(0,-1.524)
  oct 1.9x3.2 smd: 2(0,0.9)
  silkscreen extent -2.48,-2.07 2.3,1.3, body extent -2.25,-2.1 2.25,2.2, height 1.51
STM-LQFP100_N [mm] "Thin QFP, 100-Leads, Body 14x14mm, Pitch 0.5mm, IPC Medium Density"
  oval 1.8x0.3 smd: 1(-7.55,6) 2(-7.55,5.5) 3(-7.55,5) 4(-7.55,4.5) 5(-7.55,4) 6(-7.55,3.5) 7(-7.55,3) 8(-7.55,2.5) 9(-7.55,2) 10(-7.55,1.5) 11(-7.55,1) 12(-7.55,0.5) 13(-7.55,0) 14(-7.55,-0.5) 15(-7.55,-1) 16(-7.55,-1.5) 17(-7.55,-2) 18(-7.55,-2.5) 19(-7.55,-3) 20(-7.55,-3.5) 21(-7.55,-4) 22(-7.55,-4.5) 23(-7.55,-5) 24(-7.55,-5.5) 25(-7.55,-6) 51(7.55,-6) 52(7.55,-5.5) 53(7.55,-5) 54(7.55,-4.5) 55(7.55,-4) 56(7.55,-3.5) 57(7.55,-3) 58(7.55,-2.5) 59(7.55,-2) 60(7.55,-1.5) 61(7.55,-1) 62(7.55,-0.5) 63(7.55,0) 64(7.55,0.5) 65(7.55,1) 66(7.55,1.5) 67(7.55,2) 68(7.55,2.5) 69(7.55,3) 70(7.55,3.5) 71(7.55,4) 72(7.55,4.5) 73(7.55,5) 74(7.55,5.5) 75(7.55,6)
  oval 0.3x1.8 smd: 26(-6,-7.55) 27(-5.5,-7.55) 28(-5,-7.55) 29(-4.5,-7.55) 30(-4,-7.55) 31(-3.5,-7.55) 32(-3,-7.55) 33(-2.5,-7.55) 34(-2,-7.55) 35(-1.5,-7.55) 36(-1,-7.55) 37(-0.5,-7.55) 38(0,-7.55) 39(0.5,-7.55) 40(1,-7.55) 41(1.5,-7.55) 42(2,-7.55) 43(2.5,-7.55) 44(3,-7.55) 45(3.5,-7.55) 46(4,-7.55) 47(4.5,-7.55) 48(5,-7.55) 49(5.5,-7.55) 50(6,-7.55) 76(6,7.55) 77(5.5,7.55) 78(5,7.55) 79(4.5,7.55) 80(4,7.55) 81(3.5,7.55) 82(3,7.55) 83(2.5,7.55) 84(2,7.55) 85(1.5,7.55) 86(1,7.55) 87(0.5,7.55) 88(0,7.55) 89(-0.5,7.55) 90(-1,7.55) 91(-1.5,7.55) 92(-2,7.55) 93(-2.5,7.55) 94(-3,7.55) 95(-3.5,7.55) 96(-4,7.55) 97(-4.5,7.55) 98(-5,7.55) 99(-5.5,7.55) 100(-6,7.55)
  silkscreen extent -7.68,-6.25 6.25,6.82, body extent -7,-7 7,7, height 1.6
TO-263-5 [mm]
  rect 1.1x2.8 smd: 1(-3.4,0) 2(-1.7,0) 3(0,0) 4(1.7,0) 5(3.4,0)
  rect 10.8x9 smd: 6(0,11.2)
  silkscreen extent -5.9,-1.9 5.9,16.2, body extent -5.08,-0.32 5.08,14.32, height 4.57
tpd [mm]
  round 1 smd: 1(0,0)
XTAL-3225-2 [mm]
  rect 1.5x2.5 smd: 1(-1.2,0) 2(1.2,0)
  silkscreen extent -1.6,-1.5 1.6,1.5, body extent -1.6,-1.25 1.6,1.25, height 0.9

## Part data
C1 C2 C8: library part CAP2, "电解电容"
C3 C4 C10 C13 C37 C38 C41 C42 C46 C47: library part CAP4, "贴片电容 10%"
C5 C6 C7 C11 C16 C17 C18 C35 C39 C40 C43 C44 C45 C51 C52 C55 C56 C57 C165 C166 NC: library part CAP4, "贴片电容 20%"
C9 C12 C14 C21 C22 C23 C24 C25 C26 C27 C28 C29 C30 C31 C32 C33 C34: library part CAP, "Capacitor"
C19 C20 C36 C50 C164: library part CAP4, "贴片电容 5%"
D1: library part D_ESD
D3 D4: library part DIODE
D7 D8: library part DIODE2, "二极管 M7"
DS1: library part DISCHARE-1, "气体放电管 90V"
F1: library part Inductor, "Inductor"
F2: library part "Fuse 1", "Fuse"
L1 L4: library part IND
L3: library part CIZHU1, "磁珠电感 100R 100MHz"
LED1: library part LED0, "LED 3528 蓝"
LED2: library part LED
NC R9 R10 R11 R12 R19 R20 R21 R22 R34 R35 R36 R37 R38 R39 R40 R41 R42 R43 R44 R45 R46 R47 R48 R49 R50 R51 R78 R79 R180 R181 R182: library part RES2, "贴片电阻 5%"
P1 P12: library part SIP-4
P2 P3 P4 P5: library part HDR1*4
P6 P7 P8 P9 P16 P17 P28: "Header, 2-Pin"
P10: library part RES3, "卧贴"
P11: "Header, 7-Pin, Dual row"
P13: library part SIP-6, "血压计接口"
P14: library part SIP-5, "心音传感器接口"
P15: "Header, 6-Pin"
P22 P27: library part SIP-2, "2.54mm- 2P立贴"
Q1 Q2 Q4 Q6 Q18: library part "MOSFET P", "MOSFET P"
Q3 Q5 Q7 Q8 Q9 Q10 Q13 Q14 Q15 Q19: library part NPN-1, "NPN"
Q11: library part SI7940DP
Q12: library part SI7135DP
Q16 Q17: library part NPN-TO252, "NPN TO252"
R1 R2 R3 R4 R5 R6 R7 R13 R14 R15 R16 R17 R18 R68 R69 R70 R71 R183 R184 R185 R186: library part R, "贴片电阻 5%"
R8 R72: library part RES
R23 R24 R52 R53 R54 R55 R60 R61 R62 R63 R64 R65 R66 R67: library part R, "贴片电阻 1%"
R25 R26 R27 R28 R29 R30 R31 R32 R33 R56 R57 R58 R59: library part RES0, "贴片电阻 5%"
R187 R188 R189 R190: library part RES-SOP, "贴片电阻 5%"
SWD1: library part SIP-4, "ISP 下载"
TVS1 TVS2 TVS5 TVS6: library part TVS-S, "单向TVS"
TVS3 TVS4: library part TVS-1, "TVS"
TVS7 TVS8 TVS41 TVS42: library part TVS-1, "ESD二极管"
U1: library part LM2596
U2: library part B0505S
U3: library part E104-BT503, "E104-BT503"
U5: library part W25Q128FV
U6: library part REF3012
U7: library part bq24171
U8: library part MMR901, "压力传感器"
U9: library part LM358, "运放"
U10: library part STM32F405VGTx
VR1 VR2: library part LM1117, "三端稳压器"
Y1: library part XTAL, "3225 贴片晶振"

## Free pads (board coordinates)
  round 157.48 hole 118.11: 0(95.8,3354) 0(97.8,138.8) 0(3552,3375) 0(3554,136)

## Via types
v1: diameter 30, hole 20, Top Layer to Bottom Layer, tented both sides, 436 vias
v2: diameter 20, hole 12, Top Layer to Bottom Layer, tented both sides, 224 vias
v3: diameter 35, hole 25, Top Layer to Bottom Layer, tented both sides, 4 vias
v4: diameter 40, hole 25, Top Layer to Bottom Layer, tented both sides, 2 vias

## Nets (pads, with @x,y where several pads share a name; then routed paths per layer and width w, separated by ;. In a path a pad name is that pad's centre, name@x,y a point inside that pad or via, vN(x,y) a via of type N, cw(c..) or ccw(c..) an arc to the next point about the centre after c; other vN are vias at no path point)
ADC_SPO: P11.12 U10.33 | length 6558.1
  Top Layer w10: v2(243,177) 243,284 37,490 37,2449 138,2550 545,2550 586,2591 1236,2591 1259.43,2567.57 U10.33@1259.43,2417.24
  Bottom Layer w10: v2(243,177) 337,83 2062,83 2123,22 2852.02,22 P11.12@2913.02,83
ADS129X_CS: P11.7 U10.51 | length 5529.3
  Top Layer w10: v2(268,381.7) 263.3,381.7 111.8,533.2 111.8,2381.8 163,2433 549,2433 625.78,2356.22 U10.51@863.76,2356.22
  Bottom Layer w10: v2(268,381.7) 249,362.7 249,273 386,136 2666.02,136 P11.7@2713.02,183
ADS129X_CS2: P11.9 U10.45 | length 6204.7
  Top Layer w10: v2(242,143) 292,193 292,296.7 78,510.7 78,2421 158,2501 569,2501 613,2545 995,2545 1023.2,2516.8 U10.45@1023.2,2417.24 ; v2(1703,58) 1710,58 1725.53,42.47 2738.47,42.47 2770,74 2770,139.98 P11.9@2813.02,183
  Bottom Layer w10: v2(242,143) 327,58 v2(1703,58)
ADS129X_DIN: P11.10 U10.54 | length 5525.8
  Top Layer w10: v2(221,513) 199.88,513 168,544.88 168,2314.16 207.84,2354 513,2354 569.83,2297.17 U10.54@863.76,2297.17
  Bottom Layer w10: v2(221,513) 221,259 374,106 2077,106 2143,40 2770.02,40 P11.10@2813.02,83
ADS129X_DOUT: P11.3 U10.53 | length 5189.1
  Top Layer w10: v2(324.3,388) 290.49,421.81 268.44,421.81 149,541.25 149,2323 197,2371 528,2371 582.15,2316.85 U10.53@863.76,2316.85
  Bottom Layer w10: v2(324.3,388) 301,364.7 301,291 412,180 2291,180 2349,238 2458.02,238 P11.3@2513.02,183
ADS129X_DRDY: P11.1 U10.36 | length 5776.1
  Top Layer w10: v2(271,288) 57,502 57,2438.09 144.91,2526 556,2526 598,2568 1166,2568 1202,2532 1202,2418.87 U10.36@1200.37,2417.24
  Bottom Layer w10: v2(271,288) 270,287 399,158 2306,158 2331,183 P11.1@2413.02,183
ADS129X_DRDY2: P11.11 U10.46 | length 6280
  Top Layer w10: v2(240,103) 314,177 314,297.33 95.8,515.53 95.8,2413.8 167,2485 587,2485 624,2522 968,2522 1003.52,2486.48 U10.46@1003.52,2417.24 ; v2(1606,27) 1606.53,26.47 2828.47,26.47 2862,60 2862,131.98 P11.11@2913.02,183
  Bottom Layer w10: v2(240,103) 316,27 v2(1606,27)
ADS129X_SCLK: P11.5 U10.52 | length 5321.8
  Top Layer w10: v2(322,356) 322,357.4 276.4,403 264.63,403 127.8,539.83 127.8,2357.8 184,2414 541,2414 618.46,2336.54 U10.52@863.76,2336.54 U10.52@863.22,2336
  Bottom Layer w10: v2(322,356) 322,305 424,203 2260,203 2318,261 2535.02,261 P11.5@2613.02,183
AV3.3: C42.2 C43.2 C44.2 C46.2 U8.1 VR2.2 VR2.4 | length 1409.3
  Top Layer w20: C42.2@1268,2923 v2(1391,2923) 1445.33,2923 U8.1@1449.2,2926.87 ; v2(1789,2923) 1809,2903 1853,2903 v2(1869,2887) ; v2(1973.98,2774.02) 1973.98,2772.02 2065,2681 VR2.4@2065,2539 ; C46.2@1996,2159 1994,2161 C43.2@1994,2224 1994,2239 2065.55,2310.55 VR2.2@2065.55,2367.94
  Bottom Layer w20: v2(1391,2923) 1427.47,2886.53 1460.69,2886.53 1502,2845.22 1711.22,2845.22 v2(1789,2923) ; v2(1869,2887) 1869,2877 v2@1972.98,2773.02
AVDD: C11.2 C12.1 C47.2 P11.2 U2.6 VR2.3 | length 5625.2
  Top Layer w30: VR2.3@2156.1,2359 2156.1,2226.9 C47.2@2158,2225 2579.52,2225 2609.26,2254.74 2725.26,2254.74 2851,2129 v1(2946,2129) ; P11.2@2413.02,83 2299,83 2256,126 2256,384 2310,438 U2.6@2507,438 ; v1(3530,2478) 3580,2428 v1(3580,1392)
  Bottom Layer w30: C12.1@2442,528 C11.2@2508,528 ; U2.6@2507,438 2507,527 C11.2@2508,528 ; v1(2946,2129) 2946,2308 3037.28,2399.28 3318.28,2399.28 3397,2478 v1(3530,2478) ; v1(3580,1392) 3585,1387 3585,712 3544,671 3247,671 3190,614 2782,614 2699,531 C11.2@2511,531 C11.2@2508,528
AVSS: C11.1 C12.2 C42.1 C43.1 C44.1 C46.1 C47.1 P11.4 R72.1 U2.4 U8.3 U8.8 VR2.1 | length 8959.8
  Top Layer w10: U8.3@1449.2,2826.87 1404.13,2826.87 v2(1387.06,2843.94) 1370,2861 C44.1@1343,2861 1341,2863 C42.1@1268,2863 1189,2863 1170,2882 1170,3001 1245,3076 v2(1940,3076) ; v2(1645,2776.87) U8.8@1716.92,2776.87 ; v2(1900,2627) 1900,2541 1954,2487 1954,2416 1975,2395 VR2.1@1975,2359 1975,2302 1934,2261 C43.1@1934,2224 1934,2161 C46.1@1936,2159 1937.7,2159 1968.7,2128 2075,2128 2098,2151 C47.1@2098,2225 ; v2(2119,1076) 2119,1016 2205,930 v2(2205,624) ; v2(2119,1290.88) v2(2119,1729) ; P11.4@2513.02,83 2467.02,129 2336,129 2287,178 2287,360 2320,393 2662,393 U2.4@2707,438 2707,540 2653,594 v2(2557,594) ; R72.1@2928,844 2931,841 v2(2931,776)
  Bottom Layer w10: v2(1387.06,2843.94) 1424,2807 1458,2807 1488.13,2776.87 v2(1645,2776.87) ; v2(1900,2627) 1989,2627 2030,2668 2030,2851 1940,2941 v2(1940,3076) 2874,3076 2941,3009 2941,2580 2119,1758 v2(2119,1729) ; v2(2119,1076) v2(2119,1290.88) ; v2(2205,624) 2322,624 2358.94,587.06 C12.2@2442,587.06 2507.06,587.06 C11.1@2511,591 2514,594 v2(2557,594) 2603,640 2976,640 2996,660 2996,711 v2(2931,776)
BDATA: U3.8 U10.4 | length 1851.5
  Top Layer w10: U10.4@1458.24,1942.83 1525.47,1942.83 1538.3,1930 v2(1542,1930) ; U3.8@2748,2855.24 v2(2748,2899)
  Bottom Layer w10: v2(1542,1930) 1969,1930 2748,2709 v2(2748,2899)
BDISC: U3.6 U10.7 | length 1743.2
  Top Layer w10: U10.7@1458.24,2001.89 1512.11,2001.89 1524,1990 v2(1545,1990) ; U3.6@2648,2855.24 v2(2648,2899)
  Bottom Layer w10: v2(1545,1990) 1958,1990 2648,2680 v2(2648,2899)
BLE_EN_3.3V: R70.1 U10.37 | length 1661.6
  Top Layer w10: U10.37@1180.69,2417.24 1180.69,2358.31 v2(1199,2340) ; v2(1453,2451) 1453,2544 1500,2591 1641,2591 v2(2205,3155)
  Bottom Layer w10: v2(1199,2340) 1228,2311 1412,2311 1432,2331 1432,2430 v2(1453,2451) ; v2(2205,3155) 2267,3217 R70.1@2267,3226
BLINK: U3.7 U10.5 | length 1789.1
  Top Layer w10: U10.5@1458.24,1962.52 1535.48,1962.52 v2(1542,1956) ; U3.7@2698,2855.24 v2(2698,2896)
  Bottom Layer w10: v2(1542,1956) 1957,1956 2698,2697 v2(2698,2896)
BMOD: U3.4 U10.9 | length 1611.6
  Top Layer w10: U10.9@1458.24,2041.26 1515,2041.26 1520.74,2047 v2(1574,2047) ; U3.4@2548,2855.24 v2(2548,2891)
  Bottom Layer w10: v2(1574,2047) 1933,2047 2548,2662 v2(2548,2891)
BREATH+: P12.2 R65.1 TVS8.1 | length 350.9
  Bottom Layer w10: R65.1@3169,1183.8 3175.8,1177 TVS8.1@3250,1177 3295,1177 3337,1219 3337,1268 3370,1301 P12.2@3437,1301
BREATH-: P12.3 R63.1 TVS7.2 | length 377.2
  Bottom Layer w10: R63.1@3169,1253.2 3172.8,1257 TVS7.2@3249,1257 3290,1257 3316,1283 3316,1358.11 3358.89,1401 P12.3@3440.94,1401
BREATH_OUT: C38.2 R64.2 U10.34 | length 2765.3
  Top Layer w10: v2(1239,2041) 1239.74,2041.74 U10.34@1239.74,2417.24 ; v2(1955,2112) 2137,2112 2208,2183 2623,2183 2647,2207 v2(2690,2207) v2@2690,2208
  Bottom Layer w10: v2(1239,2041) 1529,2041 1558,2070 1913,2070 v2(1955,2112) ; v2(2690,2207) 2690,1717 2692,1717 2818,1591 C38.2@2818,1470 2818,1396 R64.2@2820,1394
BRST: U3.22 U10.35 | length 1784.4
  Top Layer w10: v2(1206,2560) 1220.06,2545.94 U10.35@1220.06,2417.24 ; v2(1623,2560) 1648.75,2560 2302.75,3214 2462,3214 2498,3250 U3.22@2498,3308
  Bottom Layer w10: v2(1206,2560) v2(1623,2560)
BRXD: U3.19 U10.24 | length 1654
  Top Layer w10: U10.24@1458.24,2336.54 1505.54,2336.54 1524,2355 1524,2412.63 2302.37,3191 2579.02,3191 2648,3259.98 U3.19@2648,3308
BTXD: U3.18 U10.23 | length 1714.2
  Top Layer w10: U10.23@1458.24,2316.85 1519.85,2316.85 1548,2345 1548,2414 2306,3172 2602,3172 2698,3268 U3.18@2698,3308
BWKP: U3.5 U10.8 | length 1666
  Top Layer w10: U10.8@1458.24,2021.57 1540.43,2021.57 v2(1546,2016) ; U3.5@2598,2855.24 v2(2598,2890)
  Bottom Layer w10: v2(1546,2016) 1941,2016 2598,2673 v2(2598,2890)
EARTH: C14.1 pad.0@3554,136 R8.2 TP1.1 | length 513.3
  Top Layer w30: R8.2@3197,208 3336,208 C14.1@3339,211 ; TP1.1@3339,87 C14.1@3339,211 ; pad.0@3554,136 3479,211 C14.1@3339,211
GND: C1.2 C2.2 C3.1 C4.1 C5.1 C6.1 C7.1 C8.2 C9.2 C10.1 C13.1 C14.2 C16.1 C17.1 C18.1 C19.2 C20.2 C21.2 C22.2 C24.2 C25.2 C26.2 C27.1 C30.2 C31.2 C32.2 C33.1 C34.2 C35.1 C36.2 C37.2 C38.1 C39.1 C40.1 C41.1 C45.1 C50.2 C51.1 C52.1 C55.1 C56.1 C57.1 C164.2 D1.2 D3.1 D4.1 DS1.2 LED1.2 P1.1 P1.2 P2.1 P3.1 P4.1 P5.3 P10.2 P11.8 P11.13 P12.1 P13.2 P13.3 P14.2 P14.5 P28.1 Q1.1 Q3.2 Q5.2 Q7.2 Q8.2 Q9.2 Q10.2 Q14.2 Q16.3 Q17.3 Q19.2 R5.1 R8.1 R14.1 R18.1 R31.2 R32.2 R33.2 R41.1 R44.1 R46.1 R50.1 R51.2 R54.1 R59.2 R66.1 R71.1 R72.2 R79.1 R182.2 R189.2 R190.2 SWD1.3 TVS1.1 TVS2.1 TVS3.1 TVS4.1 TVS5.1 TVS6.1 TVS7.1 TVS8.2 TVS41.2 TVS42.2 U1.3 U1.5 U1.6 U2.2 U3.1 U3.9 U3.16 U5.4 U6.3 U7.22 U7.23 U7.25 U9.4 U10.10 U10.20 U10.27 U10.74 U10.99 VR1.1 | length 1288.5
  Top Layer w10: U10.74@863.76,1903.46 943.46,1903.46 v2(973,1933) ; C33.1@874.46,1054.9 v2(874.46,1079.54) ; U7.23@1054.91,1039.42 U7.22@1054.91,1059.1 1058.08,1062.28 1074.23,1062.28 1122,1110.05 U7.25@1122,1128 ; 1094.3,1442.16 1152.16,1442.16 1153.91,1443.91 ; C25.2@1315.91,1157.53 1315.91,1175.91 1327,1187 v2(1328,1187) ; U10.99@1377.54,1822.76 1377.54,1772.46 1407,1743 v2(1409,1743) ; U10.27@1377.54,2417.24 1377.54,2349.33 ; v2(1387,2006) 1378,2015 1378,2045 1393.94,2060.94 U10.10@1458.24,2060.94 ; v2(1400.33,2349.33) 1377.54,2349.33 ; U10.20@1458.24,2257.8 1407.2,2257.8 1377.54,2287.46 1377.54,2349.33 ; v2(2827,2203) 2849.52,2180.48 LED1.2@2869.27,2180.48 ; v2(3189,2668) 3205,2684 R54.1@3219,2684
  Bottom Layer w10: TVS41.2@620,1901 620,1928 v2(650,1958) ; U5.4@1316.37,2625 1432,2625 v2(1478,2671) ; Q8.2@1403.4,549.21 1394,558.61 R31.2@1394,618 v2(1435,618)
  other v1: 2973,131 3043,131 3113,131 3393,131 3113,201 1083,271 1153,271 1503,271 1573,271 2063,271 2133,271 2203,271 3393,271 3463,271 3533,271 3603,271 383,341 1083,341 1153,341 1433,341 1503,341 1573,341 2063,341 2133,341 2203,341 3323,341 3393,341 3463,341 3533,341 3603,341 383,411 1713,411 2063,411 2133,411 2203,411 2833,411 3463,411 3533,411 3603,411 313,481 943,481 1713,481 2273,481 2833,481 3113,481 3463,481 3533,481 3603,481 313,551 1713,551 2833,551 2903,551 3113,551 3323,551 3393,551 3463,551 3533,551 3603,551 453,621 1713,621 2063,621 2133,621 383,691 453,691 1013,691 3183,691 383,761 453,761 523,761 3043,761 3113,761 3253,761 3323,761 3533,761 523,831 1433,831 2343,831 2413,831 2483,831 2553,831 2623,831 2693,831 3043,831 3113,831 3183,831 3323,831 3533,831 523,901 1223,901 3253,901 3533,901 383,971 523,971 1363,971 1433,971 1923,971 2063,971 3043,971 3113,971 3183,971 3323,971 3393,971 3463,971 3533,971 383,1041 523,1041 2063,1041 3043,1041 3323,1041 3393,1041 3463,1041 3533,1041 243,1111 313,1111 383,1111 523,1111 1923,1111 2063,1111 2903,1111 3323,1111 3393,1111 3463,1111 3533,1111 243,1181 313,1181 383,1181 523,1181 803,1181 1573,1181 1643,1181 1713,1181 2063,1181 2903,1181 3533,1181 243,1251 313,1251 383,1251 803,1251 1783,1251 1853,1251 1923,1251 2063,1251 2903,1251 3533,1251 383,1321 1223,1321 1503,1321 1573,1321 1643,1321 1783,1321 1853,1321 1923,1321 2063,1321 2833,1321 2903,1321 3533,1321 383,1391 1223,1391 1503,1391 1573,1391 1713,1391 1783,1391 1853,1391 1923,1391 2063,1391 2273,1391 2343,1391 2413,1391 2483,1391 2553,1391 2623,1391 3043,1391 3533,1391 1853,1461 2273,1461 2693,1461 3043,1461 3113,1461 3183,1461 3323,1461 3533,1461 1503,1531 1643,1531 1713,1531 1853,1531 2203,1531 2273,1531 3323,1531 383,1601 1013,1601 2203,1601 2273,1601 2343,1601 2693,1601 3323,1601 3533,1601 383,1671 1433,1671 1503,1671 1643,1671 1713,1671 1853,1671 2063,1671 2203,1671 2273,1671 2343,1671 2553,1671 2833,1671 3463,1671 3533,1671 243,1741 313,1741 383,1741 1083,1741 1153,1741 2203,1741 2273,1741 2483,1741 2553,1741 2623,1741 2763,1741 3323,1741 3393,1741 3463,1741 3533,1741 243,1811 803,1811 2413,1811 2483,1811 2553,1811 2623,1811 2763,1811 3533,1811 313,1881 383,1881 1573,1881 1853,1881 2413,1881 2483,1881 2553,1881 3533,1881 383,1951 2413,1951 2483,1951 2553,1951 3533,1951 383,2021 2483,2021 2553,2021 3533,2021 2553,2091 2623,2091 3113,2091 383,2231 453,2231 3253,2231 383,2301 2833,2301 2903,2301 3253,2301 2833,2371 2903,2371 3533,2371 1503,2441 2273,2441 2903,2441 2973,2511 3323,2511 383,2581 2973,2581 3323,2581 3533,2581 383,2651 663,2651 103,2721 663,2721 873,2721 3533,2721 103,2791 173,2791 663,2791 873,2791 3533,2791 103,2861 173,2861 873,2861 943,2861 1013,2861 1083,2861 2973,2861 3533,2861 103,2931 173,2931 873,2931 943,2931 2973,2931 3113,2931 3253,2931 3533,2931 103,3001 173,3001 243,3001 313,3001 663,3001 733,3001 873,3001 943,3001 1293,3001 1363,3001 1433,3001 1713,3001 1783,3001 2973,3001 3323,3001 3533,3001 103,3071 173,3071 243,3071 313,3071 663,3071 733,3071 873,3071 943,3071 103,3141 173,3141 243,3141 313,3141 593,3141 663,3141 733,3141 803,3141 873,3141 943,3141 1363,3141 1923,3141 1993,3141 2063,3141 2133,3141 2763,3141 2833,3141 2903,3141 2973,3141 3323,3141 3393,3141 3603,3141 103,3211 173,3211 243,3211 313,3211 663,3211 733,3211 803,3211 873,3211 943,3211 1363,3211 1993,3211 2063,3211 2133,3211 2203,3211 2833,3211 2903,3211 2973,3211 3113,3211 3463,3211 3533,3211 3603,3211 173,3281 243,3281 313,3281 733,3281 803,3281 873,3281 943,3281 1013,3281 1223,3281 1363,3281 1433,3281 1573,3281 2063,3281 2133,3281 2203,3281 2903,3281 2973,3281 3113,3281 3253,3281 3323,3281 3393,3281 3463,3281 3603,3281 243,3351 313,3351 453,3351 873,3351 943,3351 1013,3351 1223,3351 1923,3351 2133,3351 2203,3351 2273,3351 2343,3351 2903,3351 2973,3351 3113,3351 3253,3351 3323,3351 3393,3351 243,3421 313,3421 1013,3421 1223,3421 1363,3421 1433,3421 1503,3421 1993,3421 2203,3421 2273,3421 2343,3421 2413,3421 2973,3421 3253,3421 3323,3421 3393,3421
  other v2: 815,479 807,564 671,589 806,622 687,665 991,988 1038,1001 1465,1085 1389,1090 1122,1331 824,1392 597,1950 3162,2032 3098,2152 3098,2268
  other v4: 1121,1099 1122,1155
KEY1: R186.2 TVS42.1 U10.93 | length 959.4
  Top Layer w10: v2(704,1437) 719,1437 799.16,1517.16 1208.16,1517.16 1231,1540 1231,1717 1259.43,1745.43 U10.93@1259.43,1822.76
  Bottom Layer w10: TVS42.1@672,1378 670,1380 R186.2@670,1438 703,1438 v2(704,1437)
KEY2: R184.2 TVS41.1 U10.92 | length 836.1
  Top Layer w10: v2(1203,1748) 1230,1748 1239.74,1757.74 U10.92@1239.74,1822.76
  Bottom Layer w10: TVS41.1@680,1901 680,1844 R184.2@679,1843 771,1843 787,1859 787,1907 806,1926 936.66,1926 1046.26,1816.4 1154.6,1816.4 1203,1768 v2(1203,1748)